# Altium PCB PoHalf-Small.PcbDoc (part 1 of 2)
Units mil, origin at the board's own origin, x right, y up, seen from the top; angles counter-clockwise.
Board outline 2900 x 4650 mil, 2 copper layers (Top Layer, Bottom Layer), stack 33.512 mil thick; 148 components, 103 nets, 556 pads, 176 vias.
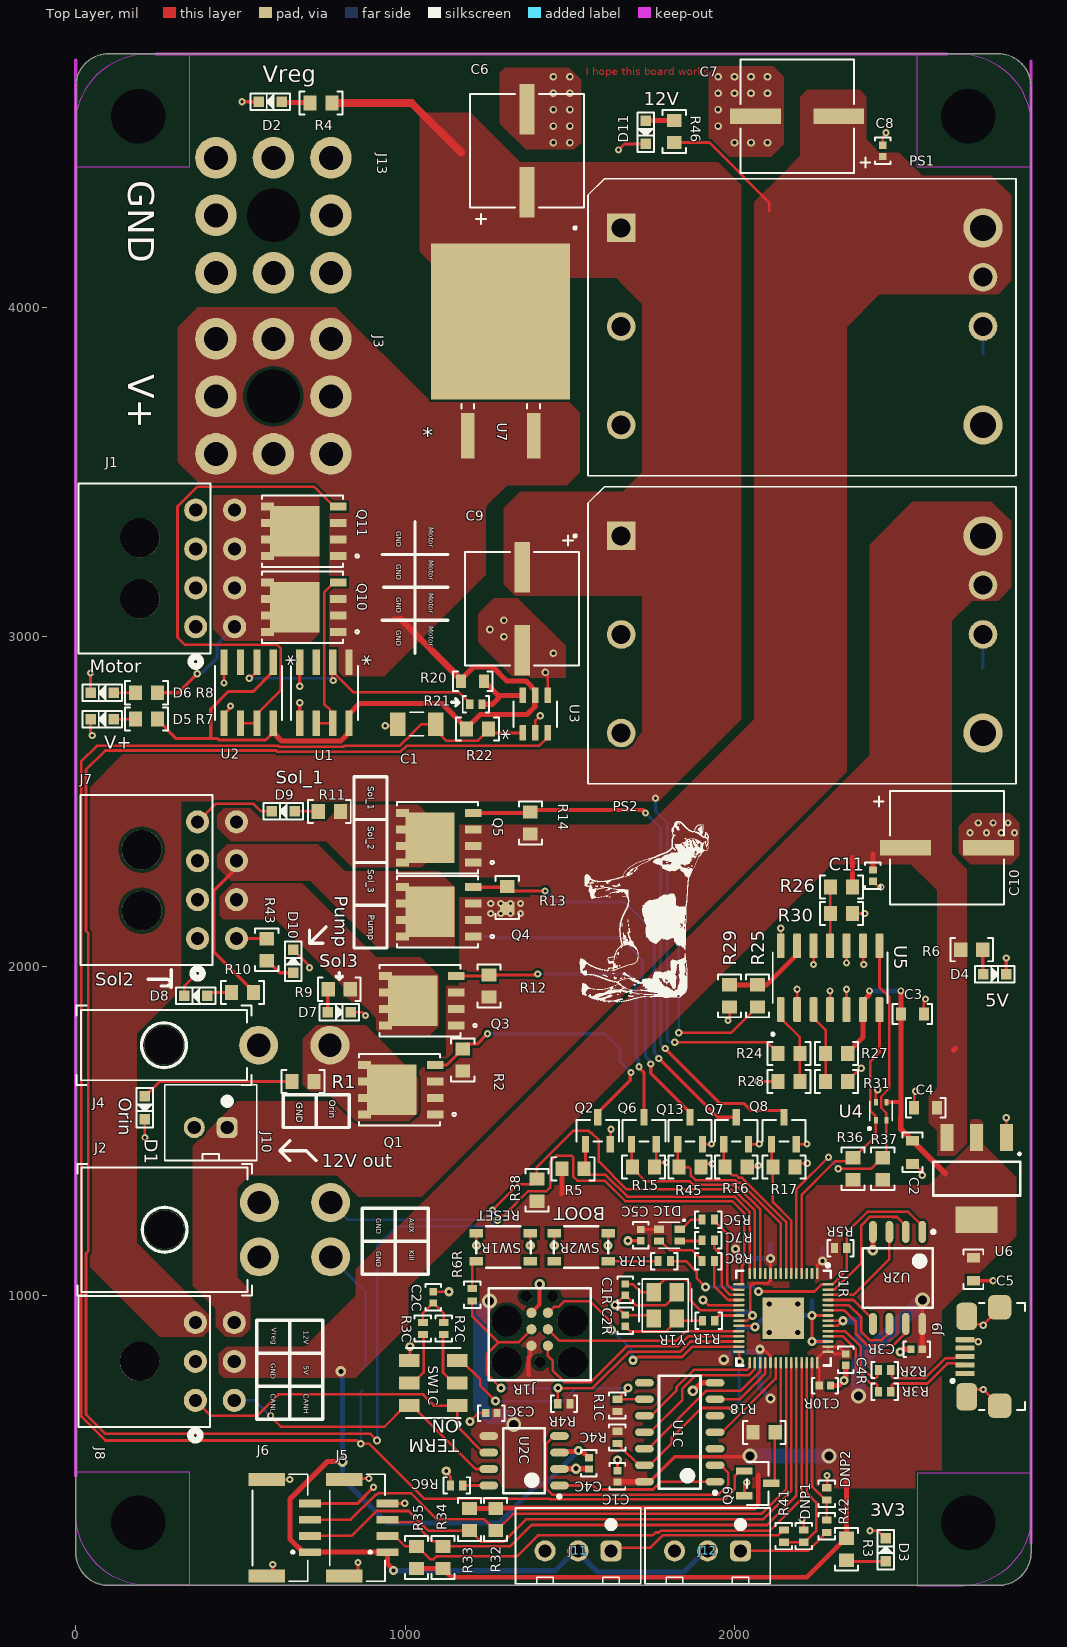
[diagram p0: Top Layer view]
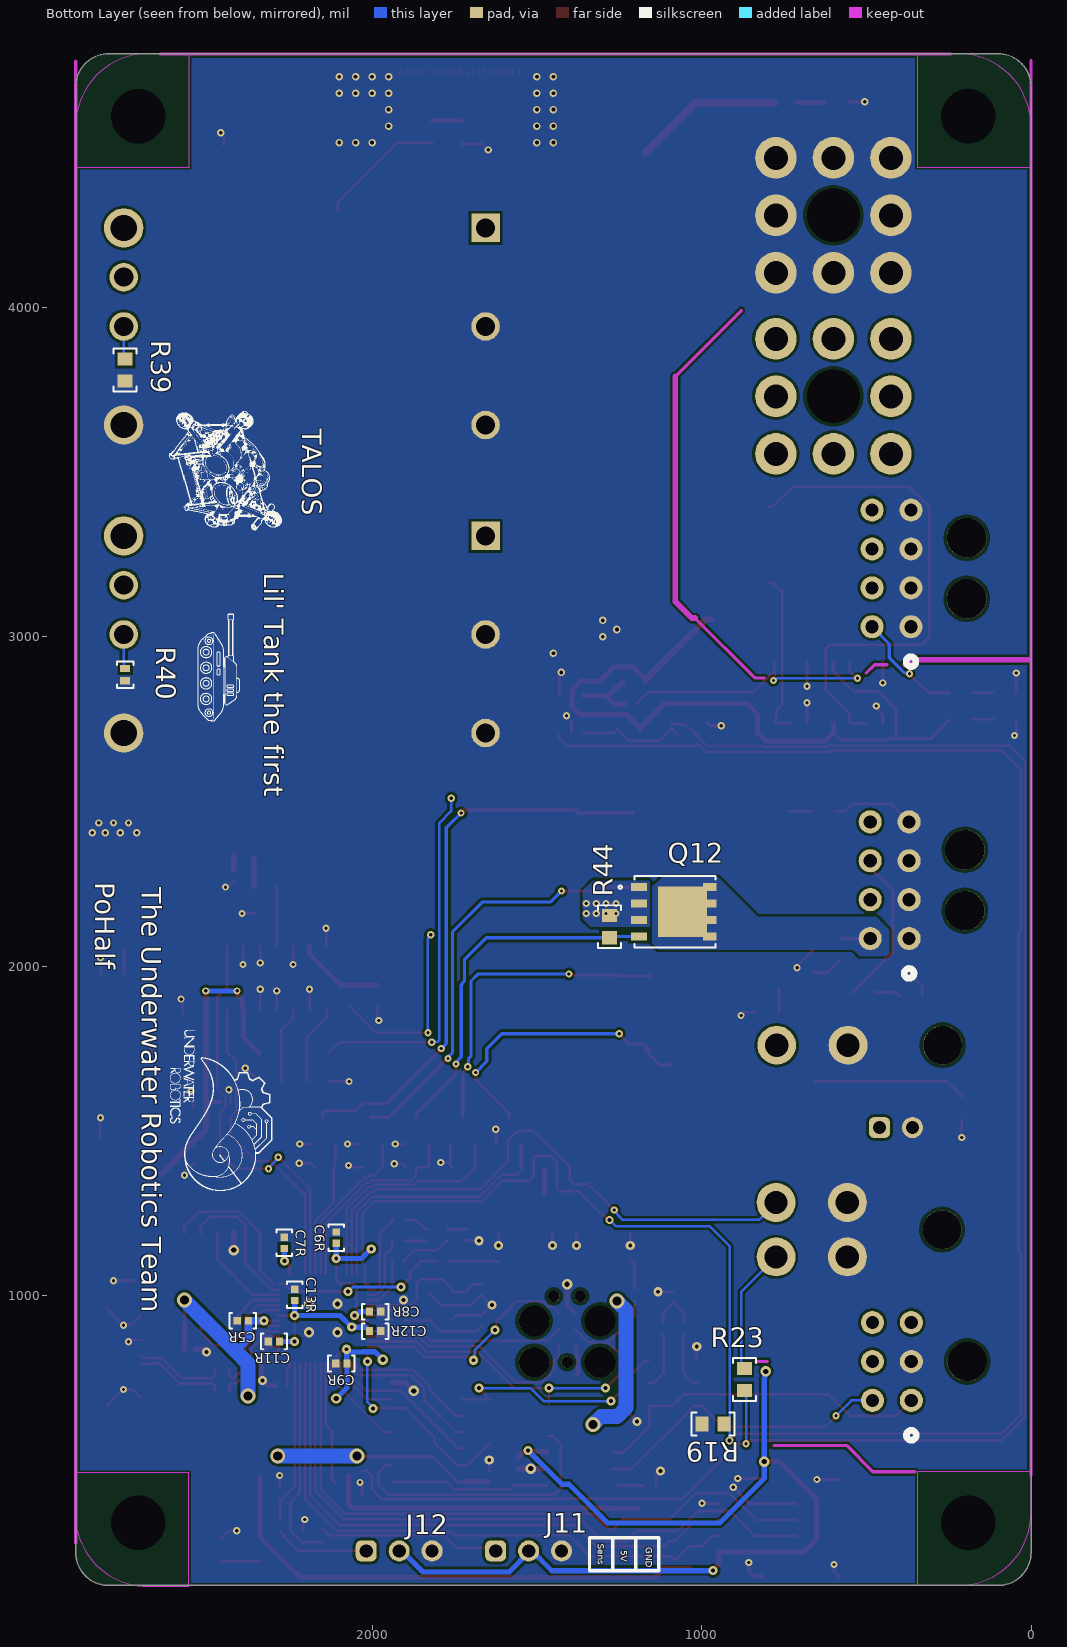
[diagram p1: Bottom Layer view, seen from below]
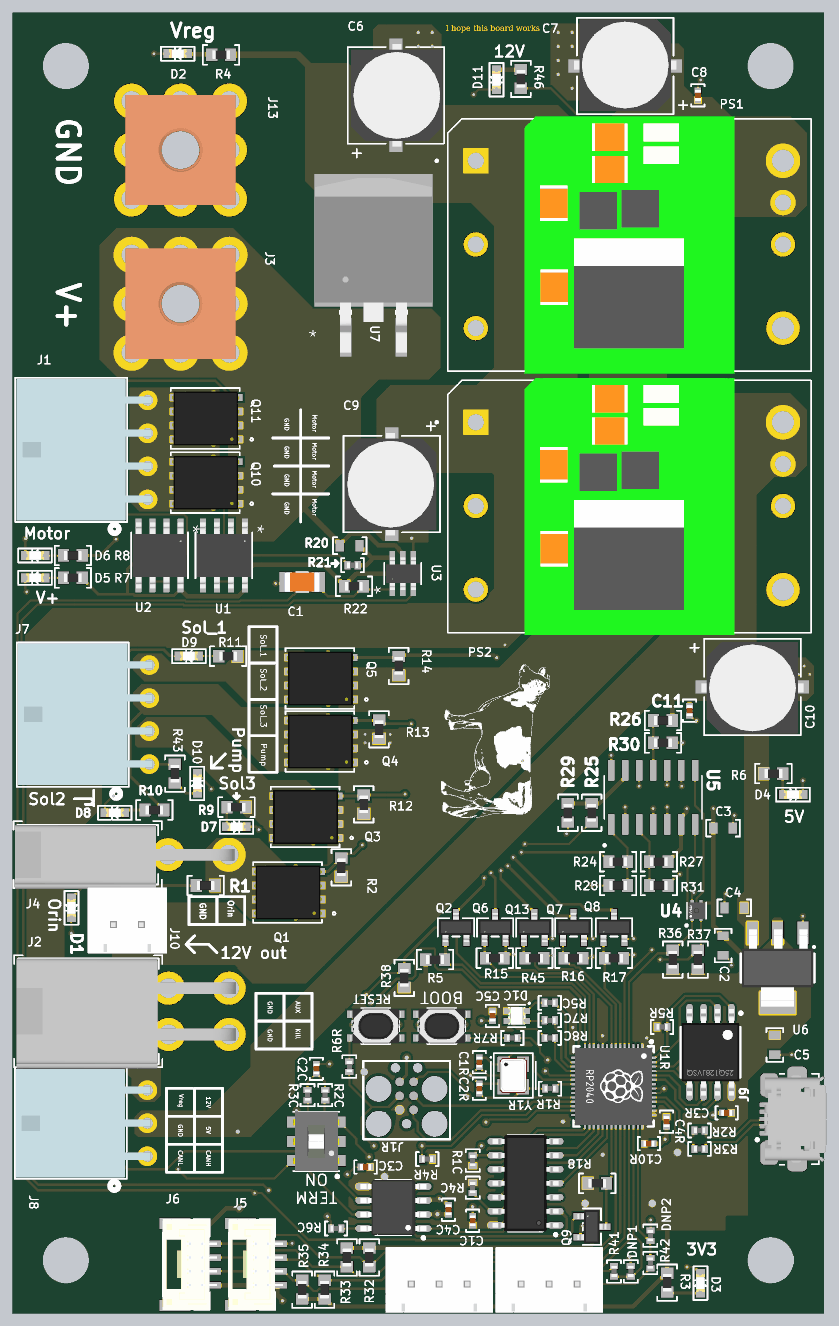
[diagram p3: 3D render of the assembled board from above, using the file's embedded part models]
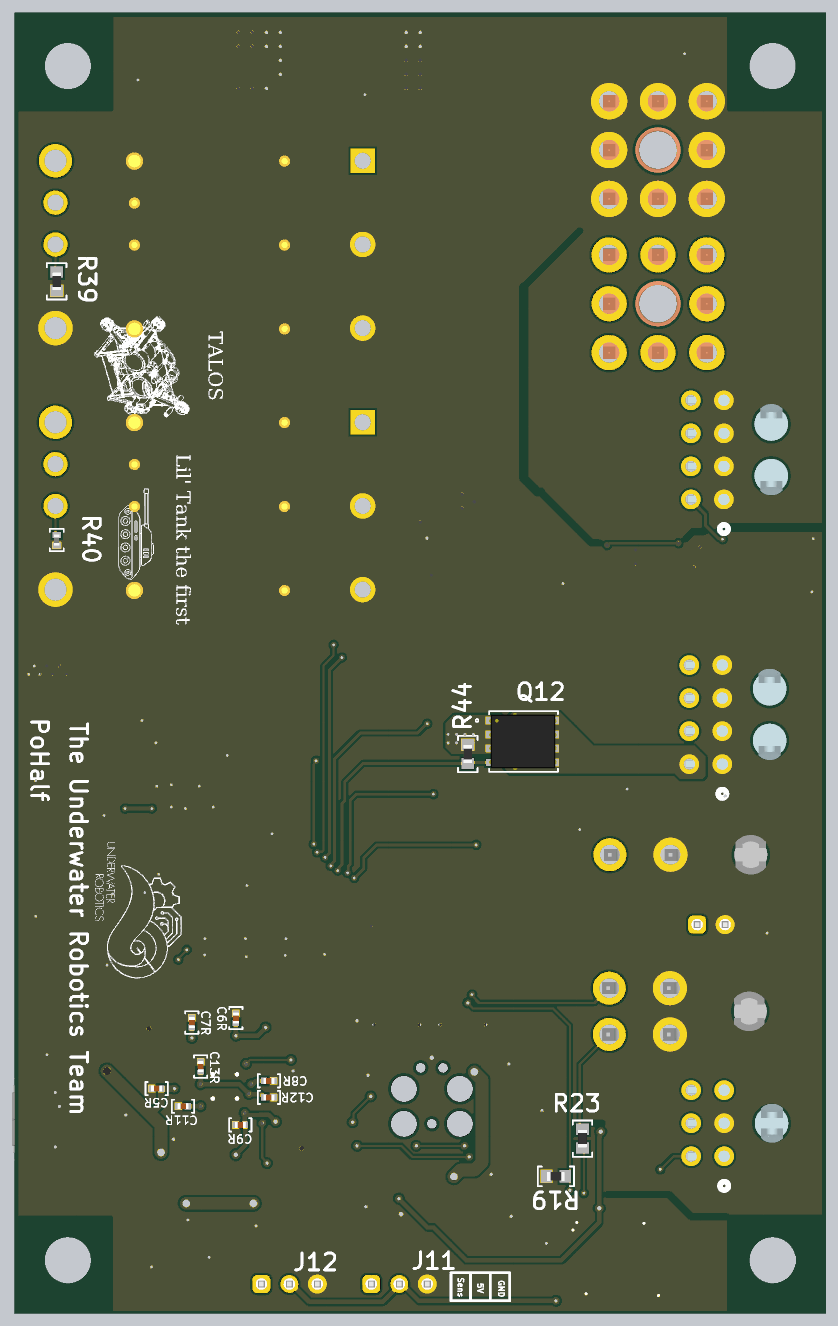
[diagram p4: 3D render of the assembled board from below, using the file's embedded part models]

## Layer stack, top to bottom
Top Solder: solder mask 1, SM-001, Dk 4
Top Layer: signal copper 2.7559
Dielectric 3: core 28, Core-039, Dk 4.8
Bottom Layer: signal copper 2.7559
Bottom Solder: solder mask 1, SM-001, Dk 4

## Board outline
2800,4770 cw(c2800,4670) 2900,4670 2900,4340 2900,275 2900,220 cw(c2800,220) 2800,120 100,120 cw(c100,220) 0,220 0,4670 cw(c100,4670) 100,4770 245,4770 2490,4770

## Design rules (kind name [scope] priority, off if disabled: settings)
AcuteAngle [All] p1: minimum=6.00000000000000E+0001 checktracksonly=FALSE
BoardOutlineClearance "BoardOutlineClearance JLCPCB" [All] p1: gap=7.87 ignorepadtopadclearanceinfootprint=FALSE
Clearance "Clearance JLCPCB 4 layer" [All] p1: gap=7.87 ignorepadtopadclearanceinfootprint=FALSE except(5: SMDPad-SMDPad; 6.3: Arc-Arc Arc-Track Arc-SMDPad Track-Track Track-SMDPad; 10: Arc-Hole Track-Hole SMDPad-Hole THPad-Hole Via-Hole Fill-Hole Poly-Hole Region-Hole Text-Hole)
DiffPairsRouting [All] p1: maxlimit=10 minlimit=6 mostfreqgap=8 toplayer_minwidth=3.54 toplayer_maxwidth=15 toplayer_prefwidth=8 bottomlayer_minwidth=3.54 bottomlayer_maxwidth=15 bottomlayer_prefwidth=8 maxuncoupledlength=500
HoleSize "HoleSize JLCPCB Pad" [IsPad] p1: absolutevalues=TRUE maxlimit=248.03 minlimit=19.68 maxpercent=80.000 minpercent=20.000
HoleSize "HoleSize JLCPCB 4 layer" [All] p2: absolutevalues=TRUE maxlimit=248.03 minlimit=7.87 maxpercent=80.000 minpercent=20.000
HoleToHoleClearance "HoleToHoleClearance JLCPCB" [All] p1: gap=10 allowstackedmicrovias=TRUE
MinimumAnnularRing "MinimumAnnularRing JLCPCB Pad" [IsPad] p1: minimumring=11.81
MinimumAnnularRing "MinimumAnnularRing JLCPCB 1oz" [All] p2: minimumring=5.12
MinimumSolderMaskSliver [All] p1: minsoldermaskwidth=1
PlaneConnect [All] p1: pad.planeconnectstyle=Relief pad.reliefexpansion=20 pad.reliefentries=4 pad.reliefconductorwidth=10 pad.reliefairgap=10 via.planeconnectstyle=Direct via.reliefexpansion=20 via.reliefentries=4 via.reliefconductorwidth=10 via.reliefairgap=10
PolygonConnect [All] p1: connectstyle=Direct reliefconductorwidth=15 reliefentries=4 polygonreliefangle="45 Angle" airgapwidth=10
RoutingVias "RoutingVias JLCPCB 4 layer" [All] p1: holewidth=19.68 width=39.37 viastyle="Through Hole" minholewidth=7.87 minwidth=15.75 maxholewidth=50 maxwidth=80
SilkToSilkClearance [All] p1: silktosilkclearance=3
SilkToSolderMaskClearance "SilkToSolderMaskClearance JLCPCB" [IsPad] p1: minsilkscreentomaskgap=5.91 clearancetoexposedcopper=TRUE
SolderMaskExpansion "SolderMaskExpansion JLCPCB" [All] p1: expansion=1.97 istentingtop=FALSE
SupplyNets "Schematic Supply Nets_2" [InNet('MOTOR_PWR')] p1: voltage=0.000
SupplyNets "Schematic Supply Nets_7" [InNet('5v')] p2: voltage=0.000
SupplyNets "Schematic Supply Nets_6" [InNet('V+')] p3: voltage=0.000
SupplyNets "Schematic Supply Nets_5" [InNet('Vreg')] p4: voltage=0.000
SupplyNets "Schematic Supply Nets_4" [InNet('12V')] p5: voltage=0.000
SupplyNets "Schematic Supply Nets_1" [InNet('3V3_RP2CAN')] p6: voltage=0.000
SupplyNets "Schematic Supply Nets" [InNet('GND')] p7: voltage=0.000
Width "Width JLCPCB 4 layer" [All] p1: maxlimit=196.85 minlimit=3.54 preferedwidth=9.84 minimp=50.000000 maximp=50.000000 favimp=50.000000
23 further rules are at their usual default settings.

## Classes and differential pairs
component class U_PD_MK2_Power: C4 C5 C6 C7 C8 C9 C10 C11 PS1 PS2 R39 R40 U6 U7
component class U_PD_MK2_Killswitch: C1 Q9 Q10 Q11 R18 R19 R20 R21 R22 R23 U1 U2 U3
component class U_PD_MK2_Circuits: C2 C3 R24 R25 R26 R27 R28 R29 R30 R31 R32 R33 R34 R35 R36 R37 R38 U4 U5
component class Connector: D1 D2 D3 D4 D5 D6 D7 D8 D9 D10 D11 DNP1 DNP2 J1 J2 J3 J4 J5 J6 J7 J8 J9 J10 J11 J12 J13 Q1 Q2 Q3 Q4 Q5 Q6 Q7 Q8 Q12 Q13 R1 R2 R3 R4 R5 R6 R7 R8 R9 R10 R11 R12 R13 R14 R15 R16 R17 R41 R42 R43 R44 R45 R46
differential pair class "USB 2.0": USB USB_RP2040
component class U_RP2040_with_CAN: C1C C2C C3C C4C C5C D1C R1C R2C R3C R4C R5C R6C R7C R8C SW1C U1C U2C
component class U_RP2040_C: C1R C2R C3R C4R C5R C6R C7R C8R C9R C10R C11R C12R C13R J1R R1R R2R R3R R4R R5R R6R R7R SW1R SW2R U1R U2R Y1R
differential pair USB: +USB_P -USB_N
differential pair USB_RP2040: +USB_RP2040_P -USB_RP2040_N

## Components (designator, comment, footprint, x,y, rotation, side; value= is the part's Value field where it differs from the comment)
C1 "10uF Ceramic 25V" CAPACITOR_1206 1035,2735 r180 top
C1C "100nF Ceramic 25V" CAPACITOR_0402 1644.65,451.3 r90 top value=0.1uF
C1R "27pF Ceramic 50V" CAPACITOR_0402 1668.27,1018.23 r270 top value=27pF
C2 "100nF Ceramic 6.3V" CAPACITOR_0603 2540,1435 r270 top value=0.1uF
C2C "4700pF Ceramic 25V" CAPACITOR_0402 1085.59,994.61 r270 top value=4.7nF
C2R "27pF Ceramic 50V" CAPACITOR_0402 1668.27,923.74 r90 top value=27pF
C3 "100nF Ceramic 6.3V" CAPACITOR_0603 2540,1855 r0 top value=0.1uF
C3C "100nF Ceramic 25V" CAPACITOR_0402 1261.61,643.43 r180 top value=0.1uF
C3R "100nF Ceramic 6.3V" CAPACITOR_0402 2552.91,837.13 r180 top value=0.1uF
C4 "10uF Ceramic 6.3V" CAPACITOR_0603 2580,1570 r180 top
C4C "100nF Ceramic 25V" CAPACITOR_0402 1558.03,490.67 r270 top value=0.1uF
C4R "1uF Ceramic 16V" CAPACITOR_0402 2337.56,805.63 r270 top value=1uF
C5 "10uF Ceramic 6.3V" CAPACITOR_0603 2725,1080 r270 top
C5C "1uF Ceramic 16V" CAPACITOR_0402 1715.51,1183.58 r270 top value=1uF
C5R "100nF Ceramic 6.3V" CAPACITOR_0402 2392.68,923.74 r0 bottom value=0.1uF
C6 "100uF electrolytic 35 V" PCAP_8x5.4-ELECT_NCA 1370,4475 r90 top value=100uF
C6R "100nF Ceramic 6.3V" CAPACITOR_0402 2109.21,1175.71 r90 bottom value=0.1uF
C7 "22uF electrolytic 35 V" PCAP_8x5.4-ELECT_NCA 2190,4580 r180 top value=22uF
C7R "100nF Ceramic 6.3V" CAPACITOR_0402 2266.69,1159.96 r90 bottom value=0.1uF
C8 "CL05A104KA5NNNC" CAPACITOR_0402 2450,4475 r90 top
C8R "100nF Ceramic 6.3V" CAPACITOR_0402 1991.1,951.4 r180 bottom value=0.1uF
C9 "100uF electrolytic 35 V" PCAP_8x5.4-ELECT_NCA 1355,3085 r270 top value=100uF
C9R "100nF Ceramic 6.3V" CAPACITOR_0402 2093.46,793.82 r0 bottom value=0.1uF
C10 "22uF electrolytic 35 V" PCAP_8x5.4-ELECT_NCA 2645,2360 r0 top value=22uF
C10R "100nF Ceramic 6.3V" CAPACITOR_0402 2274.57,726.89 r0 top value=0.1uF
C11 "CL05A104KA5NNNC" CAPACITOR_0402 2420,2275 r270 top
C11R "1uF Ceramic 16V" CAPACITOR_0402 2298.19,860.75 r0 bottom value=1uF
C12R "100nF Ceramic 6.3V" CAPACITOR_0402 1991.1,892.24 r180 bottom value=0.1uF
C13R "100nF Ceramic 6.3V" CAPACITOR_0402 2235.2,1002.48 r90 bottom value=0.1uF
D1 "IN-S63AT5G" LED_0603 210,1570 r270 top
D1C "EAST1616RGBB4" LED_0606_4SMD 1802.13,1183.58 r180 top
D2 "IN-S63AT5G" LED_0603 590,4624 r180 top
D3 "IN-S63AT5G" LED_0603 2459,228 r90 top
D4 "IN-S63AT5G" LED_0603 2790,1975 r0 top
D5 "IN-S63AT5G" LED_0603 80,2750 r180 top
D6 "150060BS75000" LED_0603 80,2830 r180 top
D7 "IN-S63AT5G" LED_0603 800,1860 r0 top
D8 "IN-S63AT5G" LED_0603 365,1910 r180 top
D9 "IN-S63AT5G" LED_0603 630,2470 r180 top
D10 "IN-S63AT5G" LED_0603 660,2015 r90 top
D11 "IN-S63AT5G" LED_0603 1730,4531 r270 top
DNP1 "DNP" RESISTOR_0402 2210,270 r90 top
DNP2 "DNP" RESISTOR_0402 2280,398.15 r90 top
J1 "Microfit+ R/A" CONN_MOLEX_MICROFIT+_8POS_R/A#1 364.29,3030.35 r270 top
J1R "TagConnect SWD" TC2030-MCP 1408.43,797.76 r90 top
J2 "Mini-Fit Jr R/A" "CONN_MOLEX_MINIFIT JR_4 POS_R/A" 270,1200 r270 top
J3 "Redcube M4 Term 85A" "Redcube M4 Term 85A" 600,3730 r270 top
J4 "Mini-Fit Jr R/A" "CONN_MOLEX_MINIFIT JR_2 POS_R/A" 268,1760 r270 top
J5 "JST GH VERT" CONN_JST_BM04B-GHS-TBT(LF)(SN)(N) 815,295 r270 top
J6 "JST GH VERT" CONN_JST_BM04B-GHS-TBT(LF)(SN)(N) 580,295 r270 top
J7 "Microfit+ R/A" CONN_MOLEX_MICROFIT+_8POS_R/A#2 370,2083.78 r270 top
J8 "Microfit+ R/A" CONN_MOLEX_MICROFIT_6_POS_R/A 363.29,800 r270 top
J9 "USB_MICRO R/A" CONN_MINIUSB 2805,815 r90 top
J10 "XH2.54 VERT" CONN_JST_XH254_2POS_VERT 460,1510 r180 top
J11 "XH2.54 VERT" CONN_JST_XH254_3POS_VERT 1625,225 r180 top
J12 "XH2.54 VERT" CONN_JST_XH254_3POS_VERT 2018,225 r180 top
J13 "Redcube M4 Term 85A" "Redcube M4 Term 85A" 600,4279.49 r0 top
PS1 "I6A4W020A033V-001-R" CONV_I6A4W020A033V-001-R 2205,3940 r0 top
PS2 "I6A4W020A033V-001-R" CONV_I6A4W020A033V-001-R 2205,3005 r0 top
Q1 "SIR167DP-T1-GE3" MOSFET_7DP-T1-GE3_VIS 984.5,1625 r180 top
Q2 "AO3404A" SOT-23-3 1585,1500 r0 top
Q3 "SIR167DP-T1-GE3" MOSFET_7DP-T1-GE3_VIS 1047.5,1895 r180 top
Q4 "SIR167DP-T1-GE3" MOSFET_7DP-T1-GE3_VIS 1100,2165 r180 top
Q5 "SIR167DP-T1-GE3" MOSFET_7DP-T1-GE3_VIS 1100,2390 r180 top
Q6 "AO3404A" SOT-23-3 1725,1500 r0 top
Q7 "AO3404A" SOT-23-3 2005,1500 r0 top
Q8 "AO3404A" SOT-23-3 2150,1500 r0 top
Q9 "MOSFET N-CH 30V 5.8A SOT-23-3" SOT-23-3 2071,430 r270 top
Q10 "SIR167DP-T1-GE3" MOSFET_7DP-T1-GE3_VIS 690,3090 r180 top
Q11 "SIR167DP-T1-GE3" MOSFET_7DP-T1-GE3_VIS 690,3320 r180 top
Q12 "SIR167DP-T1-GE3" MOSFET_7DP-T1-GE3_VIS 1082.5,2165 r180 bottom
Q13 "AO3404A" SOT-23-3 1865,1500 r0 top
R1 "4.7k Ohm 5% 1/10W" RESISTOR_0603 690,1650 r0 top
R1C "10k Ohm 1% 1/16W" RESISTOR_0402 1644.65,666.46 r90 top
R1R "1k Ohm 1% 1/16W" RESISTOR_0402 1921.3,923.74 r180 top
R2 "10k Ohm 5% 1/10W" RESISTOR_0603 1175,1715 r90 top
R2C "60.4 Ohm 1% 1/16W" RESISTOR_0402 1117.09,900.12 r90 top
R2R "27 Ohm 1% 1/16W" RESISTOR_0402 2455.67,774.13 r180 top
R3 "4.7k Ohm 5% 1/10W" RESISTOR_0603 2340,230 r90 top
R3C "60.4 Ohm 1% 1/16W" RESISTOR_0402 1054.09,900.12 r90 top
R3R "27 Ohm 1% 1/16W" RESISTOR_0402 2455.67,708.12 r180 top
R4 "3.9k Ohm 5% 1/10W" RESISTOR_0603 745,4620 r180 top
R4C "10k Ohm 1% 1/16W" RESISTOR_0402 1644.65,569.41 r270 top
R4R "10k Ohm 1% 1/16W" RESISTOR_0402 1482.24,671.77 r180 top
R5 "10k Ohm 5% 1/10W" RESISTOR_0603 1510,1385 r0 top
R5C "604 Ohm 1% 1/16W" RESISTOR_0402 1920.24,1230.83 r180 top
R5R "10k Ohm 1% 1/16W" RESISTOR_0402 2321.81,1144.21 r0 top
R6 "1k Ohm 5% 1/8W" RESISTOR_0603 2720,2050 r0 top
R6C "10k Ohm 1% 1/16W" RESISTOR_0402 1156.46,423.54 r180 top
R6R "1k Ohm 1% 1/16W" RESISTOR_0402 1203.7,1002.48 r270 top
R7 "3.9k Ohm 5% 1/10W" RESISTOR_0603 215,2750 r180 top
R7C "200 Ohm 1% 1/16W" RESISTOR_0402 1920.24,1167.83 r180 top
R7R "1k Ohm 1% 1/16W" RESISTOR_0402 1786.38,1104.84 r0 top
R8 "3.9k Ohm 5% 1/10W" RESISTOR_0603 215,2830 r180 top
R8C "200 Ohm 1% 1/16W" RESISTOR_0402 1920.24,1104.84 r180 top
R9 "4.7k Ohm 5% 1/10W" RESISTOR_0603 800,1930 r0 top
R10 "4.7k Ohm 5% 1/10W" RESISTOR_0603 506.5,1920 r0 top
R11 "4.7k Ohm 5% 1/10W" RESISTOR_0603 770,2470 r0 top
R12 "10k Ohm 5% 1/10W" RESISTOR_0603 1255,1940 r90 top
R13 "10k Ohm 5% 1/10W" RESISTOR_0603 1310,2208.5 r90 top
R14 "10k Ohm 5% 1/10W" RESISTOR_0603 1380,2435 r90 top
R15 "10k Ohm 5% 1/10W" RESISTOR_0603 1723.5,1390 r0 top
R16 "10k Ohm 5% 1/10W" RESISTOR_0603 2005,1390 r0 top
R17 "10k Ohm 5% 1/10W" RESISTOR_0603 2150,1390 r0 top
R18 "100k Ohm 0.5% 1/10W" RESISTOR_0603 2090,585 r0 top
R19 "10k Ohm 5% 1/10W" RESISTOR_0603 965,610 r180 bottom
R20 "47K" CAPACITOR_0603 1205,2865 r180 top
R21 "1k Ohm 1% 1/16W" RESISTOR_0402 1215,2795 r0 top
R22 "100k Ohm 0.5% 1/10W" RESISTOR_0603 1220,2720 r0 top
R23 "1k Ohm 5% 1/8W" RESISTOR_0603 870,745 r90 bottom
R24 "10k Ohm 0.5% 1/10W" RESISTOR_0603 2165,1735 r0 top
R25 "10k Ohm 0.5% 1/10W" RESISTOR_0603 2070,1910 r90 top
R26 "10k Ohm 0.5% 1/10W" RESISTOR_0603 2325,2240 r180 top
R27 "10k Ohm 0.5% 1/10W" RESISTOR_0603 2310,1735 r180 top
R28 "1k Ohm 5% 1/10W" RESISTOR_0603 2165,1650 r180 top
R29 "1k Ohm 5% 1/10W" RESISTOR_0603 1985,1910 r270 top
R30 "1k Ohm 5% 1/10W" RESISTOR_0603 2325,2160 r0 top
R31 "10k Ohm 0.5% 1/10W" RESISTOR_0603 2310,1650 r0 top
R32 "4.7k Ohm 5% 1/10W" RESISTOR_0603 1275,320 r270 top
R33 "4.7k Ohm 5% 1/10W" RESISTOR_0603 1195,320 r270 top
R34 "4.7k Ohm 5% 1/10W" RESISTOR_0603 1115,205 r90 top
R35 "4.7k Ohm 5% 1/10W" RESISTOR_0603 1035,205 r90 top
R36 "4.7k Ohm 5% 1/10W" RESISTOR_0603 2360,1385 r90 top
R37 "4.7k Ohm 5% 1/10W" RESISTOR_0603 2450,1385 r90 top
R38 "1k Ohm 5% 1/8W" RESISTOR_0603 1400,1320 r90 top
R39 "RES 1.24K OHM 1% 1/10W 0603" RESISTOR_0603 2750,3810 r270 bottom
R40 "RES 8.56K OHM 1% 1/16W 0402" RESISTOR_0402 2750,2885 r270 bottom
R41 "0 Ohm 1% 1/16W" RESISTOR_0402 2150,270 r270 top
R42 "0 Ohm 1% 1/16W" RESISTOR_0402 2280,300 r90 top
R43 "4.7k Ohm 5% 1/10W" RESISTOR_0603 580,2050 r90 top
R44 "10k Ohm 5% 1/10W" RESISTOR_0603 1280,2120 r270 bottom
R45 "10k Ohm 5% 1/10W" RESISTOR_0603 1865,1390 r0 top
R46 "3.9k Ohm 5% 1/10W" RESISTOR_0603 1817,4534 r90 top
SW1C "Switch DPDT" CAS-220TA 1085.59,734.76 r90 top
SW1R "434123025826" SMD_434123025826 1298.19,1147.17 r180 top
SW2R "434123025826" SMD_434123025826 1534.41,1147.17 r180 top
U1 "TC4432EOA713" SOIC8-N_MC_MCH 755,2830 r270 top
U1C "MCP2517FD" SOIC-14 1833.62,585.16 r180 top
U1R "RP2040" "QFN-56 RP2040" 2148.58,931.61 r270 top locked
U2 "TC4432EOA713" SOIC8-N_MC_MCH 525,2830 r270 top
U2C "CAN Transceiver" SOIC-8 1361.18,498.54 r180 top
U2R "W25Q128JVSIQ" "SOIC-8 W25QxJV" 2495.04,1053.72 r270 top
U3 "DG448DV-T1-E3" TSOP6_DG_VIS-M 1395,2765 r90 top
U4 "SHT14 SENSOR HUMID/TEMP" XDCR_SHT41-AD1B-R2 2445,1560 r90 top
U5 "MCP3428-E/SL" SOIC127P600X175-14N 2290,1965 r90 top
U6 "LM1117IMPX-3.3/NOPB" SOT-223-4 2735,1355 r270 top
U7 "MBRB2545CT" D2PAK_VIS 1290,3957 r0 top
Y1R "CRYSTAL 12.0000MHZ 18PF SMD" "4-SMD, NO LEAD CRYSTAL 3.2x2.5mm" 1754.88,1010.35 r270 top

## Footprints (in the part's own frame and the unit in brackets; to place one, negate y for a bottom-side part, rotate by r counter-clockwise, add the part's x,y. Pads: shape width x height; smd on the part's side, far side on the other; paste and mask are expansions set on the pad)
"4-SMD, NO LEAD CRYSTAL 3.2x2.5mm" [mm]
  rrect0% 1.4x1.1 smd: 1(0,0) 2(2.032,0) 3(2.032,1.778) 4(0,1.778)
  silkscreen extent -1.02,-1.2 3.05,2.92, body extent -0.58,-0.36 2.62,2.14, height 0.82
CAPACITOR_0402 [mm]
  rect 0.56x0.6 smd: 1(-0.435,0) 2(0.435,0)
  silkscreen extent -1.02,-0.6 1.02,0.6, body extent -0.5,-0.28 0.5,0.27, height 0.51
CAPACITOR_0603 [mil] "CAPACITOR 0603"
  rect 30x40 smd: 1(-35,0) 2(35,0)
  silkscreen extent -60,-30 60,30, body extent -31,-16 32,16, height 31
CAPACITOR_1206 [mm]
  rect 1.2x1.82 smd: 1(-1.46,0) 2(1.46,0)
  silkscreen extent -0.54,-0.9 0.54,0.9, body extent -1.6,-0.9 1.6,0.9, height 1.61
CAS-220TA [mm] "SWITCH SLIDE DPDT 100MA 6V"
  rrect0% 1x1.6 smd: 1(-1.75,-1.85) 2(0,-1.85) 3(1.75,-1.85) 4(-1.75,1.85) 5(0,1.85) 6(1.75,1.85)
  silkscreen extent -3.3,-2.1 2.7,2.1, body extent -2.7,-2.1 2.7,2.1, height 2.51
CONN_JST_BM04B-GHS-TBT(LF)(SN)(N) [mm] "JST GH Pitch 4 Pos Vertical"
  rect 0.6x1.7 smd: 1(1.875,3.35) 2(0.625,3.35) 3(-0.625,3.35) 4(-1.875,3.35)
  rect 1x2.8 smd: S1(-3.725,0) S2(3.725,0)
  silkscreen extent -4.13,-1.1 4.13,3.15, body extent -4.13,-1.12 4.13,3.83, height 4.15
CONN_JST_XH254_2POS_VERT [mm] "JST XH 2.54mm Pitch 2 Pos Vertical"
  rrect50% 1.62x1.62 hole 1.02: 1(0,0)
  round 1.62 hole 1.02: 2(2.54,0)
  silkscreen extent -2.29,-3.3 4.83,2.54, body extent -2.34,-3.35 4.88,2.49, height 7.21
CONN_JST_XH254_3POS_VERT [mm] "JST XH 2.54mm Pitch 3 Pos Vertical"
  rrect50% 1.62x1.62 hole 1.02: 1(0,0)
  round 1.62 hole 1.02: 2(2.54,0) 3(5.08,0)
  silkscreen extent -2.29,-3.3 7.37,2.54, body extent -2.34,-3.35 7.42,2.49, height 7.21
CONN_MINIUSB [mm] "USB2.0 Micro-B Receptacle SMD R/A"
  rrect50% 0.4x1.5 smd: 1(-1.3,2.675) 2(-0.65,2.675) 3(0,2.675) 4(0.65,2.675) 5(1.3,2.675)
  rrect50% 2.1x1.6 smd: 6(-3.1,2.55) 7(3.1,2.55)
  rrect50% 1.9x1.8 smd: 8(3.8,0) 9(-3.8,0)
  silkscreen extent -4.14,-1.96 4.11,3.75, body extent -3.96,-2.67 3.96,2.99, height 2.72
CONN_MOLEX_MICROFIT+_8POS_R/A#1 [mil] "MICROFIT+ 212528"
  round 70 hole 40 paste-99999 mask+0: 1(0,0) 2(-118.11,0) 3(-236.22,0) 4(-354.33,0) 5(0,118.11) 6(-118.11,118.11) 7(-236.22,118.11) 8(-354.33,118.11)
  round 120 / inner round 60 / far side round 120 hole 120 unplated paste-99999 mask-60: 9(-269.68,-169.29) 10(-84.65,-169.29)
  silkscreen extent -435,-355 121,45, body extent -431,-351 75,131, height 325
CONN_MOLEX_MICROFIT+_8POS_R/A#2 [mil] "MICROFIT+ 212528"
  round 70 / inner oval 60x70 / far side round 70 hole 40 paste-99999 mask+0: 1(0,0) 2(-118.11,0) 3(-236.22,0) 4(-354.33,0) 5(0,118.11) 6(-118.11,118.11) 7(-236.22,118.11) 8(-354.33,118.11)
  round 120 / inner round 60 / far side round 120 hole 120 unplated paste-99999 mask-60: 9(-269.68,-169.29) 10(-84.65,-169.29)
  silkscreen extent -435,-355 121,45, body extent -431,-351 75,131, height 325
CONN_MOLEX_MICROFIT_6_POS_R/A [mil] "CONN HEADER R/A 6POS 3MM"
  round 70 hole 40 paste-99999 mask+0: 1(118.11,0) 2(0,0) 3(-118.11,0) 4(118.11,118.11) 5(0,118.11) 6(-118.11,118.11)
  round 120 / inner round 60 / far side round 120 hole 120 unplated paste-99999 mask-60: 7(0,-169.29)
  silkscreen extent -199,-355 239,45, body extent -194,-353 194,129, height 325
"CONN_MOLEX_MINIFIT JR_2 POS_R/A" [mm] "Molex Minifit Jr 5569 2 Pos R/A"
  round 3 hole 1.8: 1(0,7.3) 2(0,12.8)
  round 3 hole 3 unplated mask+0: ""(0,0)
  silkscreen extent -3.05,-6.73 3.05,6.73, body extent -2.7,-6.6 3.1,13.34, height 11.4
"CONN_MOLEX_MINIFIT JR_4 POS_R/A" [mm] "Molex Minifit Jr 5569 4 Pos R/A"
  round 3 hole 1.8: 1(2.1,7.3) 2(-2.1,7.3) 3(2.1,12.8) 4(-2.1,12.8)
  round 3 hole 3 unplated mask+0: ""(0,0)
  silkscreen extent -5.08,-6.73 5.08,6.73, body extent -4.8,-6.5 5.2,13.44, height 11.4
CONV_I6A4W020A033V-001-R [mm]
  rect 2.205x2.205 hole 1.47: 1(-13.95,7.65)
  round 2.205 hole 1.47: 2(-13.95,0.05) 3(-13.95,-7.55) 6(13.95,0.05) 7(13.95,3.85)
  round 3.03 hole 2.02: 4(13.95,-7.55) 8(13.95,7.65)
  silkscreen extent -17.6,-11.45 16.5,11.45, body extent -9.53,-11.68 9.53,11.68, height 9.65
D2PAK_VIS [mil]
  rect 41x138 smd paste+0 mask+0: 1(-100,-347) 3(100,-347)
  rect 422x474 smd paste+0 mask+0: 2(0,0)
  silkscreen extent -120,-264 120,-250, body extent -210,-402 210,223, height 190
LED_0603 [mil] "LED 0603"
  rect 32x32 smd: 1(-35,0) 2(35,0)
  silkscreen extent -60,-25 60,25, body extent -31,-16 32,16, height 28
LED_0606_4SMD [mm]
  rrect0% 0.8x0.55 smd: 1(-0.8,-0.45) 2(-0.8,0.45) 3(0.8,0.45) 4(0.8,-0.45)
  silkscreen extent -1.22,-1.22 0.8,1.02, body extent -0.8,-0.8 0.8,0.8, height 0.35
MOSFET_7DP-T1-GE3_VIS [mil]
  rect 50x24 smd: 1(-107.5,75) 2(-107.5,25) 3(-107.5,-25) 4(-107.5,-75)
  rect 150x154 smd: D(24.5,0)
  rect 40x24 smd: D(107.5,75) D(107.5,-25) D(107.5,25) D(107.5,-75)
  Top Layer region: 1.75,-77 1.75,-77 1.75,-77 1.75,-77 1.75,-77 1.75,-77 1.75,-77 1.75,-77
  Top Layer region: 1.75,77 1.75,77 1.75,77 1.75,77 1.75,77 1.75,77 1.75,77 1.75,77
  silkscreen extent -170,-109 125,109, body extent -121,-101 121,101, height 41
PCAP_8x5.4-ELECT_NCA [mil]
  rect 154x47 smd paste+0 mask+0: 1(-126,0) 2(126,0)
  silkscreen extent -222,-172 172,172, body extent -183,-167 183,160, height 219
"QFN-56 RP2040" [mm] "QFN, 56-Leads, Body 7.00x7.00mm, Pitch 0.40mm, Thermal Pad 3.10x3.10mm, IPC Medium Density"
  oval 0.875x0.2 smd: 1(-3.437,2.6) 2(-3.437,2.2) 3(-3.437,1.8) 4(-3.437,1.4) 5(-3.437,1) 6(-3.437,0.6) 7(-3.437,0.2) 8(-3.437,-0.2) 9(-3.437,-0.6) 10(-3.437,-1) 11(-3.437,-1.4) 12(-3.437,-1.8) 13(-3.437,-2.2) 14(-3.437,-2.6) 29(3.437,-2.6) 30(3.437,-2.2) 31(3.437,-1.8) 32(3.437,-1.4) 33(3.437,-1) 34(3.437,-0.6) 35(3.437,-0.2) 36(3.437,0.2) 37(3.437,0.6) 38(3.437,1) 39(3.437,1.4) 40(3.437,1.8) 41(3.437,2.2) 42(3.437,2.6)
  oval 0.2x0.875 smd: 15(-2.6,-3.437) 16(-2.2,-3.437) 17(-1.8,-3.437) 18(-1.4,-3.437) 19(-1,-3.437) 20(-0.6,-3.437) 21(-0.2,-3.437) 22(0.2,-3.437) 23(0.6,-3.437) 24(1,-3.437) 25(1.4,-3.437) 26(1.8,-3.437) 27(2.2,-3.437) 28(2.6,-3.437) 43(2.6,3.437) 44(2.2,3.437) 45(1.8,3.437) 46(1.4,3.437) 47(1,3.437) 48(0.6,3.437) 49(0.2,3.437) 50(-0.2,3.437) 51(-0.6,3.437) 52(-1,3.437) 53(-1.4,3.437) 54(-1.8,3.437) 55(-2.2,3.437) 56(-2.6,3.437)
  rect 3.2x3.2 smd: 57(0,0)
  silkscreen extent -4.19,-3.65 3.65,3.65, body extent -3.52,-3.52 3.52,3.52, height 0.85
"Redcube M4 Term 85A" [mm]
  round 3.2 hole 1.85: 1(-4.435,4.435) 1(-4.435,0) 1(-4.435,-4.435) 1(0,4.435) 1(0,-4.435) 1(4.435,4.435) 1(4.435,0) 1(4.435,-4.435)
  round 3.2 hole 4.1 unplated: 8(0,0)
  body extent -5,-5 5,5, height 3
RESISTOR_0402 [mm] "Resistor 0402"
  rect 0.55x0.75 smd: 1(-0.475,0) 2(0.475,0)
  silkscreen extent -1.02,-0.64 1.02,0.64, body extent -0.5,-0.25 0.5,0.25, height 0.25
RESISTOR_0603 [mil] "Resistor 0603"
  rect 40x45 smd: 1(-33.5,0) 2(33.5,0)
  silkscreen extent -65,-35 65,35, body extent -31,-16 32,16, height 16
SMD_434123025826 [mm]
  rect 1.05x0.65 smd: A1(-2.075,1.075) A2(2.075,1.075) B1(-2.075,-1.075) B2(2.075,-1.075)
  silkscreen extent -2.1,-1.6 2.1,1.6, body extent -2.3,-1.6 2.3,1.6, height 2.5
SOIC8-N_MC_MCH [mil]
  rect 78x22 smd paste+0 mask+0: 1(-93,75) 2(-93,25) 3(-93,-25) 4(-93,-75) 5(93,-75) 6(93,-25) 7(93,25) 8(93,75)
  silkscreen extent -82,-102 82,102, body extent -118,-96 118,96, height 69
SOIC127P600X175-14N [mm]
  rrect25% 1.9x0.6 smd: 1(-2.455,3.81) 2(-2.455,2.54) 3(-2.455,1.27) 4(-2.455,0) 5(-2.455,-1.27) 6(-2.455,-2.54) 7(-2.455,-3.81) 8(2.455,-3.81) 9(2.455,-2.54) 10(2.455,-1.27) 11(2.455,0) 12(2.455,1.27) 13(2.455,2.54) 14(2.455,3.81)
  silkscreen extent -4.45,-4.43 1.95,4.51
SOIC-8 [mm] "SOIC, 8-Leads, Body 4.90x3.90mm, Pitch 1.27mm, IPC Medium Density"
  oval 1.45x0.6 smd: 1(-2.725,1.905) 2(-2.725,0.635) 3(-2.725,-0.635) 4(-2.725,-1.905) 5(2.725,-1.905) 6(2.725,-0.635) 7(2.725,0.635) 8(2.725,1.905)
  silkscreen extent -2.85,-2.5 1.6,2.88, body extent -3,-2.5 3,2.5, height 1.75
"SOIC-8 W25QxJV" [mm] "SOIC, 8-Leads, Body 5.28x5.28mm, Pitch 1.27mm, IPC Medium Density"
  oval 1.7x0.6 smd: 1(-3.55,1.905) 2(-3.55,0.635) 3(-3.55,-0.635) 4(-3.55,-1.905) 5(3.55,-1.905) 6(3.55,-0.635) 7(3.55,0.635) 8(3.55,1.905)
  silkscreen extent -3.67,-2.7 2.3,2.88, body extent -3.95,-2.62 3.95,2.62, height 1.95
SOIC-14 [mm] "SOIC, 14-Leads, Body 8.65x3.90mm, Pitch 1.27mm, IPC Medium Density"
  oval 1.45x0.6 smd: 1(-2.725,3.81) 2(-2.725,2.54) 3(-2.725,1.27) 4(-2.725,0) 5(-2.725,-1.27) 6(-2.725,-2.54) 7(-2.725,-3.81) 8(2.725,-3.81) 9(2.725,-2.54) 10(2.725,-1.27) 11(2.725,0) 12(2.725,1.27) 13(2.725,2.54) 14(2.725,3.81)
  silkscreen extent -2.85,-4.35 1.6,4.78, body extent -3,-4.4 3,4.4, height 1.7
SOT-23-3 [mil]
  rect 22x50 smd paste+0 mask+4: 1(-37.5,-41) 2(37.5,-41) 3(0,41)
  silkscreen extent -65,-32 65,32, body extent -60,-52 60,52, height 44
SOT-223-4 [mm]
  rect 2.05x1 smd paste+0 mask+0.102: 1(-3.175,2.3) 2(-3.175,0) 3(-3.175,-2.3)
  rect 2.05x3.25 smd paste+0 mask+0.102: 4(3.175,0)
  silkscreen extent -1.96,-3.35 1.3,3.35, body extent -3.5,-3.25 3.5,3.25, height 1.68
TC2030-MCP [mil]
  round 31 smd: 1(50,-25) 2(50,25) 3(100,-25) 4(100,25) 5(150,-25) 6(150,25)
  round 34 hole 35 unplated: A(0,0) B(200,40) C(200,-40)
  round 92 hole 93 unplated: D(0,-100) E(125,-100) F(0,100) G(125,100)
  silkscreen extent -55,-155 225,155
TSOP6_DG_VIS-M [mil]
  rect 47x20 smd paste+0 mask+0: 1(-57,37.4) 2(-57,0) 3(-57,-37.4) 4(57,-37.4) 5(57,0) 6(57,37.4)
  silkscreen extent -39,-66 39,66, body extent -59,-61 59,61, height 43
XDCR_SHT41-AD1B-R2 [mm] "Sensirion AG SHT14 Sensor Humidity/Temp"
  rect 0.5x0.3 smd: 1(-0.7,0.4) 2(-0.7,-0.4) 3(0.7,-0.4) 4(0.7,0.4)
  silkscreen extent -1.45,-0.87 0.75,1.01, body extent -0.75,-0.75 0.75,0.75, height 0.54

## Part data
C1: library part CAPACITOR_10uF_1206, "Cap 10uF 25V +/-10% / Ceramic 1206", Supplier Part Number 1=1276-1804-6-ND, Tolerance="+/- 10%", Value (uF)="10 uF", Voltage=25V, Made By="Robert Pafford", Supplier 1=Digi-Key
C1C C3C C3R C4C C5R C6R C7R C8R C9R C10R C12R C13R: library part CAPACITOR_0.1uF_0402, "Cap 100nF 25V +/-10% / Ceramic 0402", Supplier Part Number 1=478-7868-1-ND, Tolerance="+/- 10%", Voltage=25V, Made By="Robert Pafford", Supplier 1=Digi-Key
C1R C2R: library part CAPACITOR_0.000027uF_0402, "Cap 27pF 50V +/-5% / Ceramic 0402", Supplier Part Number 1=445-5589-1-ND, Tolerance="+/- 5%", Voltage=50V, Made By="Robert Pafford", Supplier 1=Digi-Key
C2 C3: library part CAPACITOR_0.1uF_0603, "Cap 100nF 6.3V +/-10% / Ceramic 0603", Supplier Part Number 1=399-15351-1-ND, Tolerance="+/- 10%", Voltage=6.3V, ComponentLink1Description=Datsheet, ComponentLink1URL=https://www.mouser.com/datasheet/2/212/KEM_C1002_X7R_SMD-1102033.pdf, Made By="Flip B", Supplier 1=Digi-Key
C2C: library part CAPACITOR_0.0047uF_0402, "4700 pF +/-10% 25V Ceramic Capacitor X7R 0402", Supplier Part Number 1=478-6195-1-ND, Tolerance="+/- 10%", Voltage=25V, Made By="Robert Pafford", Supplier 1=Digi-Key
C4 C5: library part CAPACITOR_10uF_0603, "Cap 10uF 6.3V +/-20% / Ceramic 0603", Supplier Part Number 1=1276-1119-1-ND, Tolerance="+/- 20%", Value (uF)="10 uF", Voltage=6.3V, ComponentLink1Description=Digikey, ComponentLink1URL=https://www.digikey.com/en/products/detail/samsung-electro-mechanics/CL10A106MQ8NNNC/3886777, Made By="Flip B", Supplier 1=Digi-Key
C4R C5C C11R: library part CAPACITOR_1uF_0402, "Cap 1uF 16V +/-10% / Ceramic 0402", Supplier Part Number 1=478-0402YD105KAT4ADKR-ND, Tolerance="+/- 10%", Voltage=16V, Made By="Robert Pafford", Supplier 1=Digi-Key
C6 C9: library part "CAP ALUM 100UF 20% 35V SMD", "100 µF 35 V Aluminum Electrolytic Capacitors Radial, Can - SMD 1000 Hrs", Manufacturer_Part_Number=UCB1V0R1MCL1GS, Mfr_Name=Nichicon, Supplier Part Number 1=667-EEE-1VA101XP, Copyright="Copyright (C) 2022 Ultra Librarian. All rights reserved.", Made By="Tyson Nguyen", RefDes=RefDes, Supplier 1=Mouser, Type=DEV
C7 C10: library part "CAP ALUM 22UF 20% 35V SMD", "22 µF 35 V Aluminum Electrolytic Capacitors Radial, Can - SMD 1000 Hrs", Supplier Part Number 1=PCE3952DKR-ND, Voltage=35V, Made By="Robert Pafford", Supplier 1=Digi-Key
C8: library part "CAP CER 0.1UF 25V X5R 0402", "0.1 µF ±10% 25V Ceramic Capacitor X5R 0402 (1005 Metric)", Capacitance=0.1uF, Rated Voltage=25V, Supplier Part Number 1=1276-1043-1-ND, Tolerance="+/- 10%", ComponentLink1Description="Data Sheet", ComponentLink1URL=https://mm.digikey.com/Volume0/opasdata/d220001/medias/docus/503/CL05A104KA5NNNC.pdf, Name="Zach Ramsey", Supplier 1=Digikey
C11: library part "CAP CER 0.1UF 25V X5R 0402", "0.1 µF ±10% 25V Ceramic Capacitor X5R 0402 (1005 Metric)", Capacitance=0.1uF, Rated Voltage=25V, Tolerance="+/- 10%", ComponentLink1Description="Data Sheet", ComponentLink1URL=https://mm.digikey.com/Volume0/opasdata/d220001/medias/docus/503/CL05A104KA5NNNC.pdf, Name="Zach Ramsey", Supplier 1=Avnet, Supplier Part Number 1=CL05A104KA5NNNC
D1 D2 D3 D4 D5 D7 D8 D9 D10 D11: library part LED_Green_0603_3V, "LED Green Vf= 3V If = 0.005A / IN-S63AT5G", Color=Green, Forward Current=5mA, Forward Voltage=3V, Package=0603, Supplier Part Number 1=1830-1062-1-ND, ComponentLink1Description=Datasheet, ComponentLink1URL=https://www.we-online.de/katalog/datasheet/150060GS75000.pdf, Made By="Robert Pafford", Supplier 1=Digi-Key
D1C: library part LED_RGB_4SMD, "LED RGB CLEAR 4SMD", Blue Forward Current=5mA, Blue Forward Voltage=2.8V, Color=RGB, Package=4-SMD, Red Forward Voltage=1.8V, Supplier Part Number 1=1080-1552-1-ND, ComponentLink1Description=Datasheet, ComponentLink1URL=https://everlightamericas.com/index.php?controller=attachment&id_attachment=3220, Green Forward Current=5mA, Green Forward Voltage=2.8V, Made By="Robert Pafford", Red Forward Current=5mA, Supplier 1=Digi-Key
D6: library part LED_Blue_0603, "LED Blue Vf= 3.2V If = 0.020A / 150060BS75000", Color=Blue, Forward Current=20mA, Forward Voltage=3.2V, Package=0603, Supplier Part Number 1=732-4966-1-ND, Made By="Robert Pafford", Supplier 1=Digi-Key
DNP1 DNP2: library part DNP_0402, "Do Not Populate 0402"
J1 J7: library part CONN_MOLEX_MICROFIT+_8POS_R/A, "Molex Microfit+  / 212528 8 POS R/A Black", Color=Black, Current Rating=12.5A, Manufacturer=Molex, Supplier Part Number 1=900-2125280800-ND, Configuration=R/A, Pitch=3.0mm, Supplier 1=Digikey
J1R: library part TC2030_SWD, "TagConnect TC2030 ARM SWD 6-pin"
J2: library part "CONN_MOLEX_MINIFIT JR_4POS_R/A", "Molex Minifit Jr. 5569  / 4 Pos R/A Natural", Color=Natural, Current Per Pin=13A, Manufacturer=Molex, Supplier Part Number 1=WM13112-ND, ComponentLink1Description=Datasheet, ComponentLink1URL=https://www.molex.com/pdm_docs/sd/026013115_sd.pdf, Configuration="Right Angle", Created By="Flip B", Number of Positions=4, Pitch=4.2mm, Series="Minifit Jr 5569", Supplier 1=Digi-Key
J3 J13: Current Rating="85 A", Created By="Nahtan Ayer", Screw Size=M4
J4: library part "CONN_MOLEX_MINIFIT JR_2POS_R/A", "Molex Minifit Jr. 5569  / 2 Pos R/A Natural", Color=Natural, Current Per Pin=13A, Manufacturer=Molex, Supplier Part Number 1=WM1351-ND, ComponentLink1Description=Datasheet, ComponentLink1URL=https://www.molex.com/pdm_docs/sd/026013115_sd.pdf, Configuration="Right Angle", Created By="Robert P", Number of Positions=2, Pitch=4.2mm, Series="Minifit Jr 5569", Supplier 1=Digi-Key
J5 J6: library part CONN_JST_GH_4POS_VERT, "JST GH Pitch 4 Pos Vertical", Color=Natural, Current Per Pin=1A, Manufacturer=JST, Supplier Part Number 1=455-1580-1-ND, Configuration=Vertical, Created By="Robert P", Number of Positions=4, Pitch=1.25mm, Series=GH, Supplier 1=Digi-Key
J8: library part CONN_MOLEX_MICROFIT+_6POS_R/A, "Molex Microfit+  / 212528 6 POS R/A Black", Color=Black, Current Per Pin=12.5, Manufacturer=Molex, Supplier Part Number 1=900-2125280600-ND, Configuration=R/A, Pitch=3.0mm, Supplier 1=Digikey
J9: library part CONN_MICROUSB, "Amphenol Micro USB-B / USB2.0 5 Pin Right Angle SMD", Color=Silver, Current Per Pin=1.8A, Manufacturer=Amphenol, Supplier Part Number 1=609-4613-1-ND, ComponentLink1Description=Datasheet, ComponentLink1URL=https://cdn.amphenol-icc.com/media/wysiwyg/files/documentation/datasheet/inputoutput/io_usb_micro.pdf?__cf_chl_jschl_tk__=05693735e19256298f6ef6ca2bb2e65c376a4f56-1625503833-0-Abitsb0-ufjOXJYs_S3J3r2iTn-nObalbmXUksF1VvO_h_WEmRdMlUD1I8-hmWSEVWzY1pirKnrPZWfgY3851qyBZe5ZvnNQePLGIzUgdEIQBVUyW36RsbYpDLEWxJ4horD-5gChFgobLYqwmG5aHl0E8lIn_twwPPrOxilK2gP0q9t_CNOs_u5fMqXvXUrlsOv8tIE2NRlu6NVP8qtkL2GjhlkeTUbDMF8WvvpPDTFOgvZ4Y16Ej8F8AhWos88mo5B1HssXozw0XrkJQIqERITUu6rqloz9kf4ZzhBHtDAt-IkiAFY_Ds9SW8FYKKTtINJVpHZQ6Gyu1FFM4Dc9MO0maE8_mmNcwlxqyRoRk_MPWW8VyByXWM5RSp52jteRKw7FeI9WIYvCbPAOy0Eyib-aseIQsnGbglBcUY6_2xp8GYaJM38H3dNvBPsSOfJBPndKedwKHllxjkucXn6xsN0sDXkpGN-cu8_2bDTJ0g-uUucKSCooYX-ApSDNGpkA_p9zv1SOAD8c0zaZVmtiBsN75QpVz2rzq9_BFxOywPvR, Configuration="Right Angle", Created By="Flip B", Number of Positions=5, Pitch=0.65mm, Series=10118192, Supplier 1=Digi-Key
J10: library part CONN_JST_XH254_2POS_VERT, "JST XH 2.54mm Pitch 2 Pos Vertical", Color=White, Current Per Pin=4A, Manufacturer=JST, ComponentLink1Description="Purchase Link", ComponentLink1URL=https://www.amazon.com/460PCS-XH2-54-Connector-Terminal-Connectors/dp/B09DBGVX5C, Configuration=Vertical, Created By="Robert P", NOTE="Do not use JST 2.5mm parts with this footprint. JST does not make 2.54mm pitch pins, rather only clones make this connector!", Number of Positions=2, Pitch=2.54mm, Series="XH 2.54"
J11 J12: library part CONN_JST_XH254_3POS_VERT, "JST XH 2.54mm Pitch 3 Pos Vertical", Color=White, Current Per Pin=4A, Manufacturer=JST, ComponentLink1Description="Purchase Link", ComponentLink1URL=https://www.amazon.com/460PCS-XH2-54-Connector-Terminal-Connectors/dp/B09DBGVX5C, Configuration=Vertical, Created By="Robert P", NOTE="Do not use JST 2.5mm parts with this footprint. JST does not make 2.54mm pitch pins, rather only clones make this connector!", Number of Positions=3, Pitch=2.54mm, Series="XH 2.54"
PS1 PS2: "Non-Isolated PoL Module DC DC Converter 1 Output 3.3 ~ 15V 20A 9V - 53V Input", Package="DIP-8 TDK-Lambda", Availability="In Stock", Check_prices=https://www.snapeda.com/parts/I6A4W020A033V-001-R/TDK-Lambda%20Americas%20Inc./view-part/1737324/?ref=eda, MF="TDK-Lambda Americas", MP=I6A4W020A033V-001-R, Price=None, Purchase-URL=https://pricing.snapeda.com/search/part/I6A4W020A033V-001-R/?ref=eda, SnapEDA_Link=https://www.snapeda.com/parts/I6A4W020A033V-001-R/TDK-Lambda%20Americas%20Inc./view-part/1737324/?ref=snap
Q1 Q3 Q4 Q5 Q10 Q11 Q12: "P-Channel 30 V 60A (Tc) 65.8W (Tc) Surface Mount PowerPAK® SO-8", Mfr_Name=Vishay, Supplier Part Number 1=78-SIR167DP-T1-GE3, Copyright="Copyright (C) 2022 Ultra Librarian. All rights reserved.", Manufacturer_Part_Number=SIR167DP-T1-GE3, RefDes=RefDes, Supplier 1=Mouser, Type=DEV
Q2 Q6 Q7 Q8 Q13: "N-Channel 30 V 5.8A (Ta) 1.4W (Ta) Surface Mount SOT-23-3", Amp Rating="5.8 A", Package=SOT23-3L, Power Dissipation="1.4W (Ta)", Supplier Part Number 1=785-1004-1-ND, Created By="Dylan T", FET Type=N-Channel, Manufacturer _Part_Number=AO3404A, Rds (on)="28mOhm @ 5.8A, 10V", SourceLibrary=ON_Semiconductor_2020-01-13, Supplier 1=Digi-Key, Vdss=30V, Vendor="Alpha & Omega Semiconductor Inc.", Vgs (Max)="3V @ 5.8A, 10V", Vgs (th)="3V @ 250µA"
Q9: library part AO3404A, "N-Channel 30 V 5.8A (Ta) 1.4W (Ta) Surface Mount SOT-23-3", Amp Rating="5.8 A", Package=SOT23-3L, Power Dissipation="1.4W (Ta)", Supplier Part Number 1=785-1004-1-ND, Created By="Dylan T", FET Type=N-Channel, Manufacturer _Part_Number=AO3404A, Rds (on)="28mOhm @ 5.8A, 10V", SourceLibrary=ON_Semiconductor_2020-01-13, Supplier 1=Digi-Key, Vdss=30V, Vendor="Alpha & Omega Semiconductor Inc.", Vgs (Max)="3V @ 5.8A, 10V", Vgs (th)="3V @ 250µA"
R1 R3 R9 R10 R11 R32 R33 R34 R35 R36 R37 R43: library part RESISTOR_4.7K_0603, "RES 4.7k OHM 5% 1/10W 0603", Digikey Part Numer=CR0603-JW-104ELFTR-ND, Supplier Part Number 1=RMCF0603JT4K70CT-ND, Tolerance="+/- 5%", Value  (Ohms)=4.7K, Made By="Robert Pafford", Supplier=Digikey, Supplier 1=Digi-Key, Wattage=1/10W
R1C R4C R4R R5R R6C: library part RESISTOR_10K_0402, "RES 10k OHM 1% 1/16W 0402", Digikey Part Numer=CR0603-JW-104ELFTR-ND, Supplier Part Number 1=YAG3436CT-ND, Tolerance="+/- 1%", Value  (Ohms)=10K, Made By="Robert Pafford", Supplier=Digikey, Supplier 1=Digi-Key, Wattage=1/16W
R1R R6R R7R R21: library part RESISTOR_1K_0402, "RES 1k OHM 1% 1/16W 0402", Digikey Part Numer=CR0603-JW-104ELFTR-ND, Supplier Part Number 1=13-AC0402FR-131KLCT-ND, Tolerance="+/- 1%", Value  (Ohms)=1K, Made By="Robert Pafford", Supplier=Digikey, Supplier 1=Digi-Key, Wattage=1/16W
R2 R5 R12 R13 R14 R15 R16 R17 R19 R44 R45: library part RESISTOR_10K_0603, "RES 10k OHM 5% 1/10W 0603", Digikey Part Numer=CR0603-JW-104ELFTR-ND, Supplier Part Number 1=2019-RK73B1JTTD103JCT-ND, Tolerance="+/- 5%", Value  (Ohms)=10K, ComponentLink1Description=Datasheet, ComponentLink1URL=https://www.bourns.com/docs/product-datasheets/CRxxxxx.pdf, Made By="Robert Pafford", Supplier=Digikey, Supplier 1=Digi-Key, Wattage=1/8W
R2C R3C: library part RESISTOR_60.4_0402, "RES 60.4 OHM 1% 1/16W 0402", Digikey Part Numer=CR0603-JW-104ELFTR-ND, Supplier Part Number 1=13-AC0402FR-0760R4LCT-ND, Tolerance="+/- 1%", Value  (Ohms)=60.4, Made By="Robert Pafford", Supplier=Digikey, Supplier 1=Digi-Key, Wattage=1/16W
R2R R3R: library part RESISTOR_27_0402, "RES 27 OHM 1% 1/16W 0402", Digikey Part Numer=CR0603-JW-104ELFTR-ND, Supplier Part Number 1=YAG5278DKR-ND, Tolerance="+/- 1%", Value  (Ohms)=27, Made By="Robert Pafford", Supplier=Digikey, Supplier 1=Digi-Key, Wattage=1/16W
R4 R7 R8 R46: library part RESISTOR_3.9K_0603, "RES 3.9k OHM 1% 1/10W 0603", Supplier Part Number 1=P3.90KHCT-ND, Tolerance="+/- 1%", Value  (Ohms)=3.9K, Made By="Robert Pafford", Supplier 1=Digi-Key, Wattage=1/10W
R5C: library part RESISTOR_604_0402, "RES 604 OHM 1% 1/16W 0402", Digikey Part Numer=CR0603-JW-104ELFTR-ND, Supplier Part Number 1=13-AC0402FR-07604RLCT-ND, Tolerance="+/- 1%", Value  (Ohms)=604, Made By="Robert Pafford", Supplier=Digikey, Supplier 1=Digi-Key, Wattage=1/16W
R6 R23 R38: library part RESISTOR_1K_0603, "RES 1k OHM 5% 1/8W 0603", Digikey Part Numer=CR0603-JW-104ELFTR-ND, Supplier Part Number 1=2019-RK73B1JTTD102JCT-ND, Tolerance="+/- 5%", Value  (Ohms)=1K, ComponentLink1Description=Datasheet, ComponentLink1URL=https://www.bourns.com/docs/product-datasheets/CRxxxxx.pdf, Made By="Robert Pafford", Supplier=Digikey, Supplier 1=Digi-Key, Wattage=1/8W
R7C R8C: library part RESISTOR_200_0402, "RES 200 OHM 1% 1/16W 0402", Digikey Part Numer=CR0603-JW-104ELFTR-ND, Supplier Part Number 1=YAG3453CT-ND, Tolerance="+/- 1%", Value  (Ohms)=200, Made By="Robert Pafford", Supplier=Digikey, Supplier 1=Digi-Key, Wattage=1/16W
R18 R22: library part RESISTOR_100K_0.5%_0603, "RES 100k OHM 0.5% 1/10W 0603", Digikey Part Numer=CR0603-JW-104ELFTR-ND, Supplier Part Number 1=311-2395-1-ND, Tolerance="+/- 0.5%", Value  (Ohms)=100K, ComponentLink1Description=Datasheet, ComponentLink1URL=https://www.bourns.com/docs/product-datasheets/CRxxxxx.pdf, Made By="John Ulm", Supplier=Digikey, Supplier 1=Digi-Key, Wattage=1/10W
R20: library part RC0603JR-1347KL, "47kohm 0603 1/10w", Mfr_Name=Yageo, Supplier Part Number 1=667-ERJ-3GEYJ473V, Copyright="Copyright (C) 2024 Ultra Librarian. All rights reserved.", Manufacturer_Part_Number=RC0603JR-1347KL, RefDes=RefDes, Supplier 1=Mouser, Type=DEV
R24 R25 R26 R27 R31: library part RESISTOR_10K_0.5%_0603, "RES 10k OHM 0.5% 1/10W 0603", Digikey Part Numer=CR0603-JW-104ELFTR-ND, Supplier Part Number 1=749-1695-1-ND, Tolerance="+/- 0.5%", Value  (Ohms)=10K, Made By="Robert Pafford", Supplier=Digikey, Supplier 1=Digi-Key, Wattage=1/10W
R28 R29 R30: library part RESISTOR_1K_0.5%_0603, "RES 1k OHM 0.5% 1/10W 0603", Digikey Part Numer=CR0603-JW-104ELFTR-ND, Supplier Part Number 1=749-1693-1-ND, Tolerance="+/- 0.5%", Value  (Ohms)=1K, Made By="Robert Pafford", Supplier=Digikey, Supplier 1=Digi-Key, Wattage=1/10W
R39: library part RESISTOR_1.24K_1%_0603, "1.24 kOhms ±1% 0.1W, 1/10W Chip Resistor 0603 (1608 Metric) Automotive AEC-Q200 Thick Film", Supplier Part Number 1=RMCF0603FT1K24CT-ND, Tolerance="+/- 1%", Value (Ohms)=1.24K, Created By="John Ulm", Supplier 1=Digi-Key, Wattage=1/10W
R40: library part RESISTOR_8.56K_1%_0402, "8.56 kOhms ±1% 0.063W, 1/16W Chip Resistor 0402 (1005 Metric) Automotive AEC-Q200, Moisture Resistant Metal Film", Supplier Part Number 1=2019-RN73H1ETTP8561F50CT-ND, Tolerance="+/- 1%", Value (Ohms)=8.56K, Made By="John Ulm", Supplier 1=Digi-Key, Wattage=1/16W
R41 R42: library part RESISTOR_0_0402, "RES 0 OHM 1% 1/16W 0402", Supplier Part Number 1=13-AC0402FR-070RLCT-ND, Tolerance="+/- 1%", Value  (Ohms)=0, Made By="Robert Pafford", Supplier 1=Digikey, Wattage=1/16W
SW1C: library part CAS-220TA_CAN_TERM, "GOLD SWITCH FLUSH SLIDE DPDT 100MA 6V", Current Rating="100 mA", Supplier Part Number 1=CAS220JCT-ND, Voltage Rating=6VDC, Contact Finish=Gold, Made By="Robert Pafford", Supplier 1=Digi-Key, Switch Function=DPDT
SW1R SW2R: library part "Tactile Switch SMD", "WS-TASV J-Bend SMT Tact Switch, SPST-NO, 16VDC, 50mA, 260g", Manufacturer="Wurth Elektronik", Operating Temperature Max=85°C, Operating Temperature Min=-40°C, Rated Current=50mA, Rated Voltage=16VDC, Category="Tact Switches", Circuit=SPST-NO, ComponentLink1Description="Website Link", ComponentLink1URL=https://www.we-online.com/redexpert/article/434123025826?ad, ComponentLink2Description="Datasheet Link", ComponentLink2URL=https://www.we-online.com/redexpert/spec/434123025826?ad, Contact Material="Stainless Steel", Contact Plating=Silver, Height=2.5mm, Length=4.2mm, Manufacturer Part Number=434123025826, Match Code=WS-TASV, Mount="Surface Mount", Operation Force=260g, Packaging="Tape and Reel", Terminal Material="Copper Alloy", Terminal Plating=Silver, Washable=No, Width=3.2mm
U1 U2: "High-Side or Low-Side Gate Driver IC Non-Inverting 8-SOIC", Mfr_Name=Microchip, Supplier Part Number 1=TC4432EOA713CT-ND, Copyright="Copyright (C) 2024 Ultra Librarian. All rights reserved.", Manufacturer_Part_Number=TC4432EOA713, RefDes=RefDes, Supplier 1=Digikey, Type=DEV
U1C: "CANbus Controller CAN 2.0 SPI Interface 14-SOIC", Made By="Robert Pafford", Max FD Rate="8 Mbps"
U1R: "Raspberry Pi RP2040", Crystal Frequency="12 MHz", Input Voltage=3.3V, Available Busses="SPI, I2C, PWM, USB", ComponentLink1Description=DigiKey, ComponentLink2Description=Datasheet, ComponentLink2URL=https://datasheets.raspberrypi.org/rp2040/rp2040-datasheet.pdf, Made By="Robert Pafford", Number of GPIOs=29
U2C: library part TJA1442AT, "CAN Interface IC High-Speed CAN Transceiver with Standby Mode", Supplier Part Number 1=771-TJA1442AT/0Z, Made By="Robert Pafford", Max Data Rate=5Mbps, Supplier 1=Mouser
U2R: "IC FLASH 128MBIT SPI/QUAD 8SOIC", Supplier Part Number 1=W25Q128JVSIQ-ND, Made By="Robert Pafford", Size=128M, Supplier 1=Digi-Key
U3: "IC SWITCH SPST-NOX1 25OHM 6TSOP", Mfr_Name=Vishay, Supplier Part Number 1=781-DG448DV-E3, Copyright="Copyright (C) 2024 Ultra Librarian. All rights reserved.", Manufacturer_Part_Number=DG448DV-T1-E3, RefDes=RefDes, Supplier 1=Mouser, Type=DEV
U4: library part SHT41-AD1B-R2, "Digital Relative Humidity Temperature Sensor, Â±1.8 / max 2.5 %RH, Â±0.2 Â°C, Ultra-Low-Power", Package=None, Supplier Part Number 1=1649-SHT41-AD1B-R2CT-ND, Availability="In Stock", Check_prices=https://www.snapeda.com/parts/SHT41-AD1B-R2/Sensirion/view-part/?ref=eda, MF=Sensirion, MP=SHT41-AD1B-R2, Price=None, Purchase-URL=https://pricing.snapeda.com/search/part/SHT41-AD1B-R2/?ref=eda, SnapEDA_Link=https://www.snapeda.com/parts/SHT41-AD1B-R2/Sensirion/view-part/?ref=snap, Supplier 1=Digi-Key
U5: "16 Bit Analog to Digital Converter 4 Input 1 Sigma-Delta 14-SOIC", Package="SOIC-14 Microchip", Supplier Part Number 1=MCP3428-E/SL-ND, Availability=Unavailable, MF=Microchip, MP=MCP3428-E/SL, Price=None, SnapEDA_Link=https://www.snapeda.com/parts/MCP3428-E/SL/Microchip/view-part/13249/?ref=snap, Supplier 1=Digikey
U6: "800-mA 15-V linear voltage regulator 4-SOT-223 -40 to 125", Package="SOT-223-4 Texas Instruments", Arrow_Electronics-Purchase-URL=https://snapeda.com/shop?store=Arrow+Electronics&id=410186, Availability=Good, DigiKey-Purchase-URL=https://snapeda.com/shop?store=DigiKey&id=410186, MF="Texas Instruments", Mouser-Purchase-URL=https://snapeda.com/shop?store=Mouser&id=410186, MP=LM1117IMPX-3.3/NOPB, Price=None, SnapEDA_Link=https://www.snapeda.com/parts/LM1117IMPX-3.3/NOPB/Texas%20Instruments/view-part/410186/?ref=snap, Texas_Instruments-Purchase-URL=https://snapeda.com/shop?store=Texas+Instruments&id=410186
U7: "Diode Array 1 Pair Common Cathode 45 V Surface Mount TO-263-3, D²Pak (2 Leads + Tab), TO-263AB", Mfr_Name=Vishay, ComponentLink1Description="Supplier Link", ComponentLink1URL=https://www.digikey.com/en/products/detail/smc-diode-solutions/MBRB2545CT/6022901, Copyright="Copyright (C) 2023 Ultra Librarian. All rights reserved.", Manufacturer_Part_Number=MBRB2545CT, RefDes=RefDes, Type=DEV
Y1R: library part CRYSTAL_12MHz_SMD_SMALL, "12 MHz ±20ppm Crystal 18pF 100 Ohms 4-SMD, No Lead (3.2x2.5mm)", Frequency="12 MHz", Load Capacitance=18pF, Supplier Part Number 1=2151-RH100-12.000-18-2030-EXT-TRCT-ND, ESR="100 Ohms", Made By="Robert Pafford", Supplier 1=Digi-Key

## Free pads (board coordinates)
  round 0 hole 165 unplated: 1(190,310) 1(190,4580) 1(2710,310) 1(2710,4580)

## Via types
v1: diameter 22, hole 10, Top Layer to Bottom Layer, tented both sides, 85 vias
v2: diameter 27.56, hole 11.81, Top Layer to Bottom Layer, tented both sides, 35 vias
v3: diameter 23, hole 12, Top Layer to Bottom Layer, tented both sides, 28 vias
v4: diameter 31.5, hole 15.75, Top Layer to Bottom Layer, tented both sides, 12 vias
v5: diameter 22.1, hole 10, Top Layer to Bottom Layer, 8 vias
v6: diameter 45.28, hole 27.56, Top Layer to Bottom Layer, tented both sides, 6 vias
v7: diameter 24, hole 12, Top Layer to Bottom Layer, tented both sides, 2 vias

## Nets (pads, with @x,y where several pads share a name; then routed paths per layer and width w, separated by ;. In a path a pad name is that pad's centre, name@x,y a point inside that pad or via, vN(x,y) a via of type N, cw(c..) or ccw(c..) an arc to the next point about the centre after c; other vN are vias at no path point)
1v1_RP2040: C11R.1 C12R.1 C13R.1 U1R.23 U1R.45 U1R.50 | length 566.9
  Top Layer w7.87: U1R.23@2013.25,907.99 2048.77,907.99 2056.64,900.12 v2@2061.97,900.12 ; U1R.45@2283.92,860.75 v2(2235.2,860.75) v2(2235.2,939.49) U1R.50@2283.92,939.49
  Bottom Layer w15.75: C12R.1@2008.23,892.24 2008.23,893.03 2015.31,900.12 2016.1,900.12 2020.14,904.16 v2(2061.97,904.16) 2097.3,939.49 v2(2235.2,939.49) C13R.1@2235.2,985.35 ; v2(2235.2,860.75) C11R.1@2281.06,860.75
3V3_MEAS: R27.2 R31.1 U5.3 | length 233.5
  Top Layer w7.87: U5.3@2240,1868.35 2240,1842.76 2276.5,1806.26 R27.2@2276.5,1735 R31.1@2276.5,1650
3V3_RP2CAN: C1C.1 C2.1 C3.1 C3C.1 C3R.1 C4R.1 C5.1 C5C.1 C5R.1 C6R.1 C7R.1 C8R.1 C9R.1 C10R.1 D1C.4 J1R.2 R1C.1 R3.2 R4C.1 R4R.1 R5.1 R5R.1 R18.1 R27.1 R32.1 R33.1 R34.1 R35.1 R36.1 R37.1 R38.1 U1C.14 U1R.1 U1R.10 U1R.22 U1R.33 U1R.42 U1R.43 U1R.44 U1R.48 U1R.49 U2C.5 U2R.8 U4.3 U5.6 U6.2 U6.4 | length 6784.2
  Top Layer w7.87: C1C.1@1644.65,434.17 C1C.1@1645.14,434.67 ; U1R.22@2013.25,923.74 2038.35,923.74 v2(2054.09,939.49) 2054.09,944.82 2047.55,951.36 2047.55,1027.43 2058.03,1037.91 2083.74,1037.91 2099.99,1037.91 2109.21,1047.14 U1R.10@2109.21,1066.95 v2(2109.21,1112.72) ; v2(2077.72,837.13) 2081.48,833.36 2091.94,833.36 2109.21,816.09 U1R.33@2109.21,796.28 ; U1R.1@2250.94,1066.95 2250.94,1091.98 2263.8,1104.84 v2(2266.69,1104.84) ; C10R.1@2257.44,726.89 2257.44,778.38 2252.83,782.99 2250.94,782.99 U1R.42@2250.94,796.28 2250.94,809.57 U1R.43@2270.63,829.25 ; U1R.48@2283.92,907.99 2312.95,907.99 v2(2328.7,923.74) U1R.49@2283.92,923.74 ; C4R.1@2337.56,822.76 C4R.1@2336.77,822.76 ; C4R.1@2336.77,822.76 2329.68,829.84 2329.68,830.63 2315.31,845 U1R.44@2283.92,845 U1R.43@2283.92,829.25 2297.2,829.25 2303.7,822.76 C4R.1@2336.77,822.76
  Top Layer w9.84: C5C.1@1715.51,1203.41 1717.92,1201 1770.33,1201 D1C.4@1770.63,1201.3 ; U1C.14@1725.85,434.67 1742.58,434.67 1818.46,510.55 2043.74,510.55 v6(2046.61,513.43) ; U2R.8@2570.04,913.95 v6(2570.04,986.73)
  Top Layer w10: C5C.1@1715.51,1201.29 C5C.1@1715.51,1203.41
  Top Layer w11.81: 1376.93,758.39 1375.02,760.3 1375.02,811.59 1379.75,816.33 1379.75,844.08 J1R.2@1383.43,847.76
  Top Layer w12: U4.3@2460.75,1587.56 2502.56,1587.56
  Top Layer w15: R35.1@1035,171.5 1117.5,171.5 1130,159 1130,156.5 1141.5,145 2219,145 2337.5,263.5 R3.2@2340,263.5 2340,450 ; R33.1@1195,353.5 R32.1@1275,353.5 ; R32.1@1275,355 2060,355 2072,367 2072,455 ; 1475,1310 1476.5,1311.5 R5.1@1476.5,1385 ; R27.1@2343.5,1735 2343.5,1737.5 2390,1784 U5.6@2390,1868.35 2394.31,1872.66 2394.31,1898.25 2408.66,1912.6 2408.66,1923.66 v1(2410,1925) ; 2502.56,1587.56 2505,1590 ; 2505,1540 2505,1590 ; v1(2505,1925) C3.1@2505,1855 2505,1590
  Top Layer w15.75: C1C.1@1645.14,434.67 U1C.14@1725.85,434.67 ; C3R.1@2570.04,837.13 U2R.8@2570.04,913.95
  Top Layer w17: 2505,1540 2505,1505 C2.1@2540,1470 2640,1370
  Bottom Layer w15: v1(2410,1925) v1(2505,1925)
  Bottom Layer w15.75: v4(1967.48,805.63) 1991.5,829.65 2026.95,829.65 2027.35,829.25 2069.84,829.25 v2(2077.72,837.13) ; v2(2002.91,1142) 2032.2,1112.72 v2(2109.21,1112.72) C6R.1@2109.21,1158.58 ; C8R.1@2008.23,951.4 2036.85,951.4 2048.77,939.49 v2(2054.09,939.49) ; v2@2077.03,829.25 2077.03,794.51 C9R.1@2076.34,793.82 2076.34,720.39 v4(2109.21,687.52) ; v2(2266.69,1104.84) C7R.1@2266.69,1142.83
  Bottom Layer w23.62: v2(2328.7,923.74) C5R.1@2375.55,923.74 2375.55,870 2414.43,831.12
  Bottom Layer w45.28: v6(1256.61,983.43) 1256.61,982.86 1229.29,955.54 1229.29,659.53 1256.22,632.6 1305.87,632.6 v6(1329.68,608.78) ; v6(2046.61,513.43) v6(2286.61,513.43) ; v6(2376.93,695.39) 2376.93,793.62 2414.43,831.12 v6(2570.04,986.73)
5V: C4.1 C4C.1 C10.1 C11.1 J5.1 J6.1 J8.5 J11.2 J12.2 PS2.7 PS2.8 R6.1 R26.1 U2C.3 U6.3 | length 3166.2
  Top Layer w15.75: v4(810,496) 764,496 651,383 651,260.42 690.24,221.18 J6.1@711.89,221.18 J5.1@946.89,221.18 946.89,185.75 965,167.64 v2(965,165) ; U2C.3@1468.46,523.54 1471.48,526.56 1523.05,526.56 v2(1526.54,530.04) ; v2@1538.77,526.27 1557.24,507.8 C4C.1@1558.03,507.8 ; R26.1@2358.5,2240 2358.5,2328.5 2360,2330 ; C11.1@2420,2292.13 2420,2340 ; 2665,1745 2670,1750
  Bottom Layer w15.75: v4(805,770) 808.01,766.99 808.01,751.99 810,750 v4(810,496) 810,445 945,310 1285,310 1402.2,427.2 1423.7,427.2 v2(1526.54,530.04) ; v2@966.05,165 1455,165 J11.2@1525,235 ; J11.2@1525,220 1584,161 1846,161 J12.2@1920,235